# Altium PCB PCB.PcbDoc
Units mm, origin at the board's own origin, x right, y up, seen from the top; angles counter-clockwise.
Board outline 130 x 90 mm, 2 copper layers (Top Layer, Bottom Layer); 12 components, 49 nets, 107 pads, 0 vias.
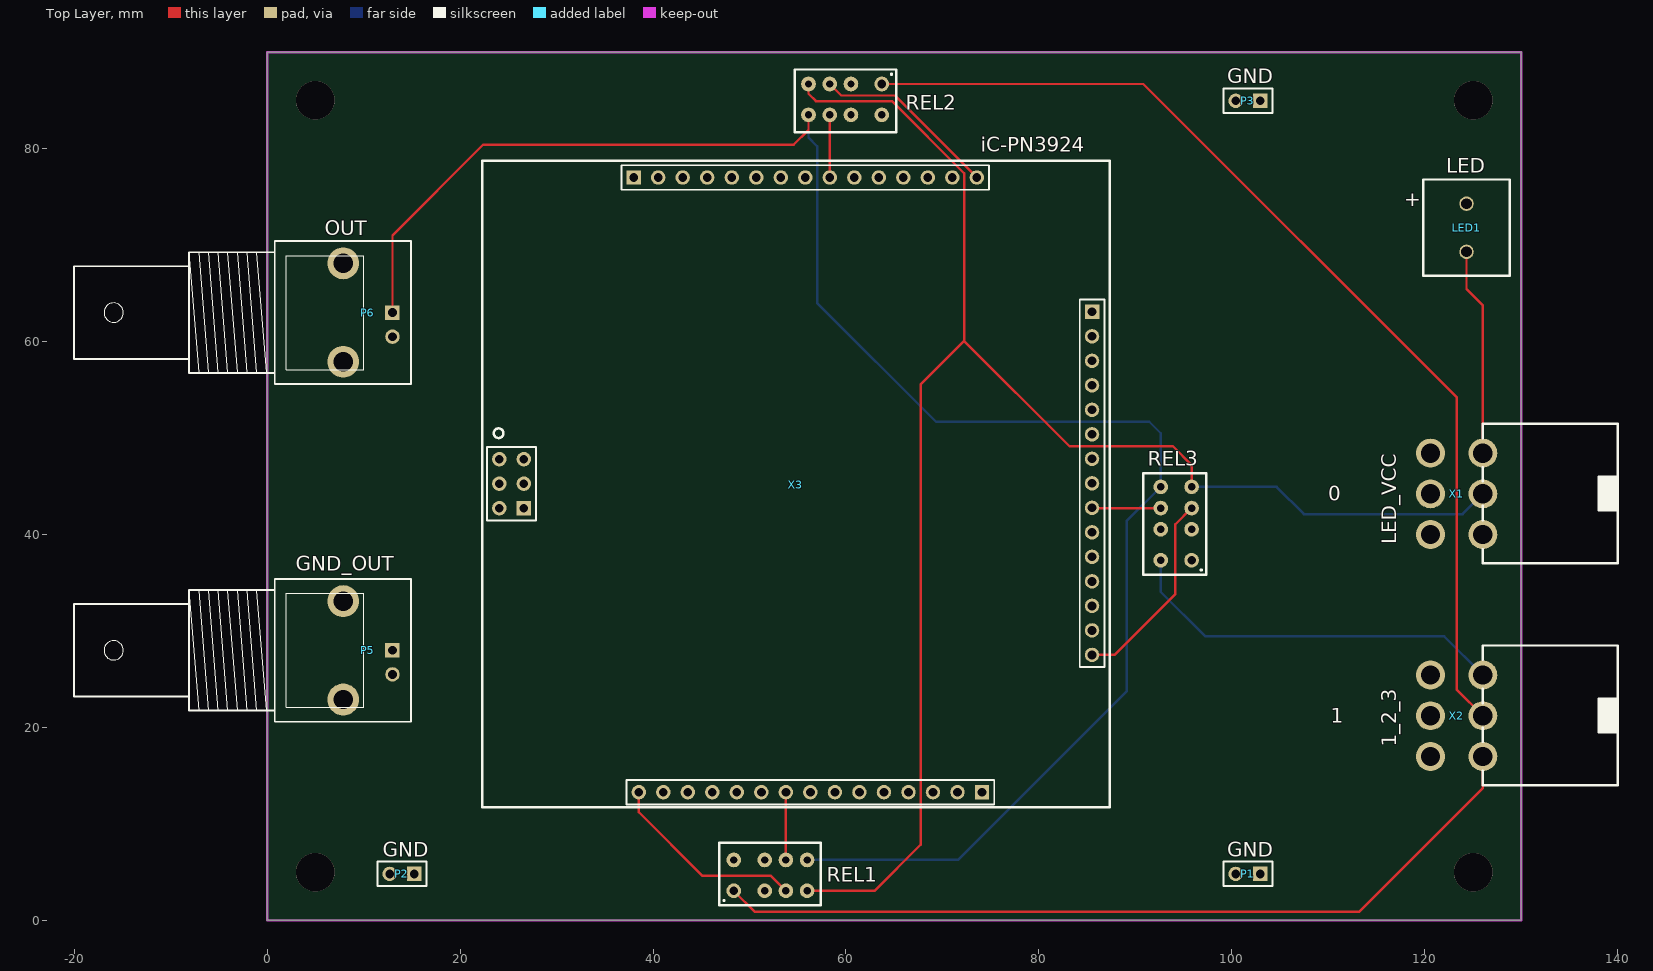
[diagram p0: Top Layer view]
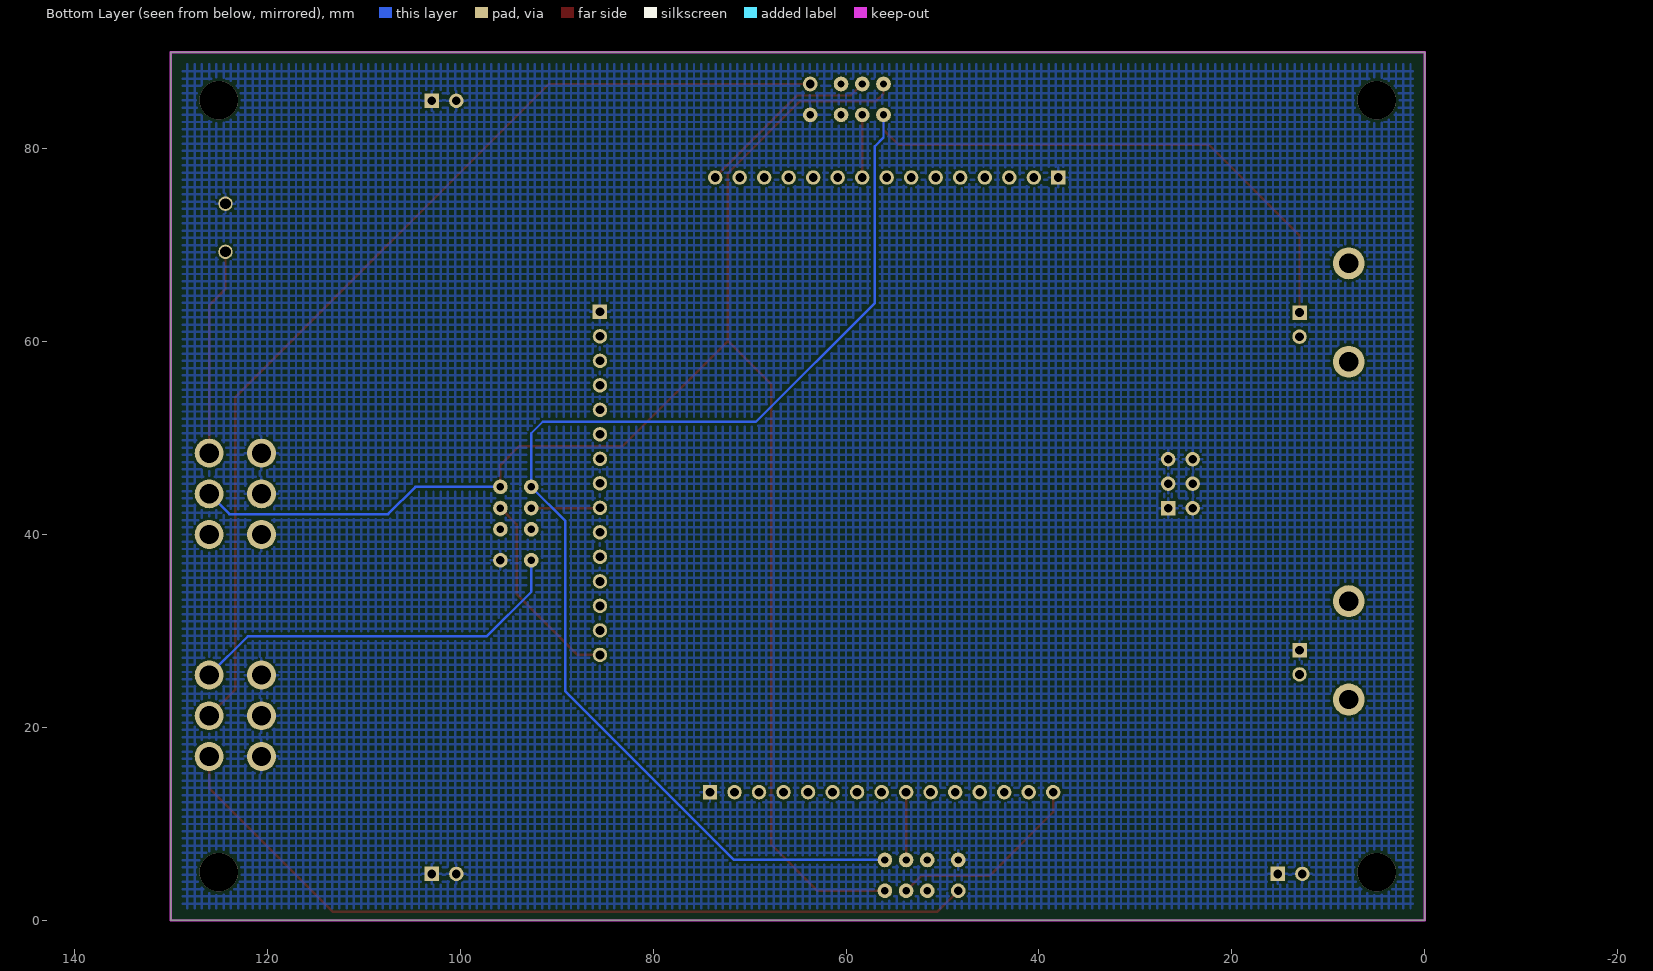
[diagram p1: Bottom Layer view, seen from below]

## Layer stack, top to bottom
Top Solder: solder mask 0.0102, Solder Resist, Dk 3.5
Top Layer: signal copper 0.0356
Dielectric 1: dielectric 0.32, FR-4, Dk 4.8
Bottom Layer: signal copper 0.0356
Bottom Solder: solder mask 0.0102, Solder Resist, Dk 3.5

## Board outline
0,0 130,0 130,90 0,90

## Design rules (kind name [scope] priority, off if disabled: settings)
Clearance [All] p1: gap=0.254
PolygonConnect [All] p1: connectstyle=Relief reliefconductorwidth=0.254 reliefentries=4 polygonreliefangle="90 Angle" airgapwidth=0.254
RoutingVias [All] p1: holewidth=0.711 width=1.27 viastyle="Through Hole" minholewidth=0.711 minwidth=1.27 maxholewidth=0.711 maxwidth=1.27
SolderMaskExpansion [All] p1: expansion=0.102
Width [All] p1: maxlimit=0.254 minlimit=0.254 preferedwidth=0.254
29 further rules are at their usual default settings.

## Components (designator, comment, footprint, x,y, rotation, side; value= is the part's Value field where it differs from the comment)
LED1 "LED" KLEMMNIK_2 124.308,74.295 r270 top
P1 "GND" HDR1X2 102.93,4.825 r180 top
P2 "GND" HDR1X2 15.249,4.825 r180 top
P3 "GND" HDR1X2 102.93,84.941 r180 top
P5 "GND_OUT" "BNC_RA CON" 13,28 r0 top
P6 "OUT" "BNC_RA CON" 13,63 r0 top
REL1 "IM03TS" IM03TS 48.37,3.075 r0 top
REL2 "IM03TS" IM03TS 63.712,86.691 r180 top
REL3 "IM03TS" IM03TS 95.818,37.339 r90 top
X1 "LED_VCC" POWER 126,40 r270 top
X2 "1_2_3" POWER 126,17 r270 top
X3 "iC-PN3924_MEZ_3X" iC-PN3924_MEZ_3X 38,77 r0 top

## Footprints (in the part's own frame and the unit in brackets; to place one, negate y for a bottom-side part, rotate by r counter-clockwise, add the part's x,y. Pads: shape width x height; smd on the part's side, far side on the other; paste and mask are expansions set on the pad)
"BNC_RA CON" [mm] "Connector; BNC Elbow"
  rect 1.5x1.5 hole 0.9: 1(0,0)
  round 3.3 hole 2: 2(-5.1,-5.1) 2(-5.1,5.1)
  round 1.5 hole 0.9: 2(0,-2.5)
  silkscreen extent -33,-7.4 1.9,7.4
HDR1X2 [mm] "Connector; Header; 2 Position"
  rect 1.5x1.5 hole 0.9: 1(0,0)
  round 1.5 hole 0.9: 2(2.54,0)
  silkscreen extent -1.27,-1.27 3.81,1.27
iC-PN3924_MEZ_3X [mm] "iC-PN3924_MEZ_3X"
  round 1.5 hole 0.9: 1(-13.923,-34.263) 1(-13.923,-31.723) 1(-13.923,-29.183) 1(-11.383,-31.723) 1(-11.383,-29.183) 2(0.533,-63.703) 3(3.073,-63.703) 4(5.613,-63.703) 5(8.153,-63.703) 6(10.693,-63.703) 7(13.233,-63.703) 8(15.773,-63.703) 9(18.313,-63.703) 10(20.853,-63.703) 11(23.393,-63.703) 12(25.933,-63.703) 13(28.473,-63.703) 14(31.013,-63.703) 15(33.553,-63.703) 17(47.498,-49.479) 18(47.498,-46.939) 19(47.498,-44.399) 20(47.498,-41.859) 21(47.498,-39.319) 22(47.498,-36.779) 23(47.498,-34.239) 24(47.498,-31.699) 25(47.498,-29.159) 26(47.498,-26.619) 27(47.498,-24.079) 28(47.498,-21.539) 29(47.498,-18.999) 30(47.498,-16.459) 32(35.56,0) 33(33.02,0) 34(30.48,0) 35(27.94,0) 36(25.4,0) 37(22.86,0) 38(20.32,0) 39(17.78,0) 40(15.24,0) 41(12.7,0) 42(10.16,0) 43(7.62,0) 44(5.08,0) 45(2.54,0)
  rect 1.5x1.5 hole 0.9: 1(-11.383,-34.263) 16(36.093,-63.703) 31(47.498,-13.919) 46(0,0)
  silkscreen extent -15.68,-65.26 49.32,1.74
IM03TS [mil] "IM03TS"
  round 60 hole 35.43: 1(0,0)
  round 60 hole 30: 2(125.98,0) 3(212.6,0) 4(299.21,0) 5(299.21,125.98) 6(212.6,125.98) 7(125.98,125.98) 8(0,125.98)
  silkscreen extent -59,-59 354,197
KLEMMNIK_2 [mm]
  round 1.5 hole 1.1: 1(0,0) 2(5,0)
  silkscreen extent -2.5,-4.5 7.5,4.5
POWER [mm] "POWER"
  round 3 hole 2: 1(0,0) 2(-4.217,0) 3(-8.435,0) 4(0,-5.422) 5(-4.217,-5.422) 6(-8.435,-5.422)
  silkscreen extent -11.5,0 3,14

## Part data
LED1: library part KLEMMNIK_2
P1 P2 P3: library part "Header 2", "Header, 2-Pin"
P5 P6: library part BNC, "BNC Elbow Connector"
X1 X2: library part POWER

## Free pads (board coordinates)
  round 4 hole 4: 0(5,5) 0(5,85) 0(125,5) 0(125,85)

## Nets (pads, with @x,y where several pads share a name; then routed paths per layer and width w, separated by ;. In a path a pad name is that pad's centre, name@x,y a point inside that pad or via, vN(x,y) a via of type N, cw(c..) or ccw(c..) an arc to the next point about the centre after c; other vN are vias at no path point)
GND: LED1.1 P1.1 P1.2 P2.1 P2.2 P3.1 P3.2 P5.1 REL1.8 REL2.8 REL3.1 X1.4 X1.5 X1.6 X2.4 X2.5 X2.6 X3.1 X3.16 X3.31 X3.46
LED: LED1.2 X1.3 | length 21.6
  Top Layer w0.254: LED1.2 124.308,65.442 126,63.75 X1.3
NC_M_1: X3.12
NC_M_2: X3.42
NC_M_3: X3.27
NC_N_1: X3.14
NC_N_2: X3.44
NC_N_3: X3.29
NC_S_1: X3.10
NC_S_2: X3.40
NC_S_3: X3.25
NS_M_1: X3.7
NS_M_2: X3.37
NS_M_3: X3.22
NS_N_1: X3.5
NS_N_2: X3.35
NS_N_3: X3.20
NS_S_1: X3.9
NS_S_2: X3.39
NS_S_3: X3.24
OUTPUT: P6.1 REL1.5 REL2.5 REL3.5 | length 186.8
  Top Layer w0.254: P6.1 13,71.006 22.386,80.392 54.568,80.392 56.112,81.936 REL2.5
  Bottom Layer w0.254: REL1.5 71.611,6.275 89.112,23.776 89.112,41.434 REL3.5 92.618,50.496 91.423,51.69 69.325,51.69 57.006,64.009 57.006,80.24 56.112,81.134 REL2.5
PC_M_1: X3.13
PC_M_2: X3.43
PC_M_3: X3.28
PC_N_1: X3.15
PC_N_2: X3.45
PC_N_3: X3.30
PC_S_1: X3.11
PC_S_2: X3.41
PC_S_3: X3.26
PS_M_1: X3.6
PS_M_2: X3.36
PS_M_3: X3.21
PS_N_1: X3.4
PS_N_2: X3.34
PS_N_3: X3.19
PS_S_1: REL1.6 X3.8 | length 7
  Top Layer w0.254: REL1.6 53.77,13.294 X3.8
PS_S_2: REL2.6 X3.38 | length 6.5
  Top Layer w0.254: REL2.6 58.312,77.008 X3.38
PS_S_3: REL3.6 X3.23 | length 7.1
  Top Layer w0.254: X3.23 85.52,42.739 REL3.6
RELAY_1: REL1.1 X2.1 | length 87.1
  Top Layer w0.254: REL1.1 50.555,0.89 113.166,0.89 126,13.724 X2.1
RELAY_2: REL2.1 X2.2 | length 107.1
  Top Layer w0.254: REL2.1 90.809,86.691 123.317,54.183 123.317,23.9 X2.2
RELAY_3: REL3.8 X2.3 | length 40.2
  Bottom Layer w0.254: REL3.8 92.618,34.062 97.24,29.44 121.995,29.44 X2.3
VCC: REL1.4 REL2.4 REL3.4 X1.2 | length 169.2
  Top Layer w0.254: REL1.4 62.95,3.075 67.725,7.85 67.725,55.551 72.246,60.072 ; REL2.4 56.112,85.681 56.879,84.913 64.779,84.913 72.246,77.446 72.246,60.072 ; REL3.4 95.818,47.22 93.887,49.15 83.168,49.15 72.246,60.072
  Bottom Layer w0.254: REL3.4 104.626,44.939 107.451,42.114 123.897,42.114 X1.2
VCC1: REL1.3 X3.2 | length 20.7
  Top Layer w0.254: X3.2 38.533,11.217 45.126,4.624 52.221,4.624 REL1.3
VCC2: REL2.3 X3.32 | length 19.3
  Top Layer w0.254: REL2.3 59.506,85.498 65.062,85.498 X3.32
VCC3: REL3.3 X3.17 | length 20.9
  Top Layer w0.254: X3.17 87.828,27.521 94.141,33.834 94.141,41.063 REL3.3
VREF1: X3.3
VREF2: X3.33
VREF3: X3.18
pads on no net: P5.2 P6.2 REL1.2 REL1.7 REL2.2 REL2.7 REL3.2 REL3.7 X1.1

## Polygon pours and split planes (outlines as drawn)
GND on Bottom Layer "Top Layer-No Net" (hatched 90Degree grid 0.75 track 0.254, remove dead copper, pour order 4): 1.25,88.75 128.75,88.75 128.75,1.25 1.25,1.25

## Keep-outs
Keep-Out Layer:
  the board outline again, w0.254

## Silkscreen, mask and mechanical layers (free items; w line width, h text height)
Top Overlay:
  text "iC-PN3924" at 73.939,79.654 h1.52
  text "+" at 117.856,74.041 h1.52
  text "0" at 110,43.488 h1.52
  text "1" at 110.254,20.488 h1.52